# Altium PCB wifi_car.PcbDoc (part 4 of 5)
Units mm, origin at the board's own origin, x right, y up, seen from the top; angles counter-clockwise.
Board outline 68.55 x 80.89 mm, 2 copper layers (Top Layer, Bottom Layer); 133 components, 98 nets, 473 pads, 106 vias.
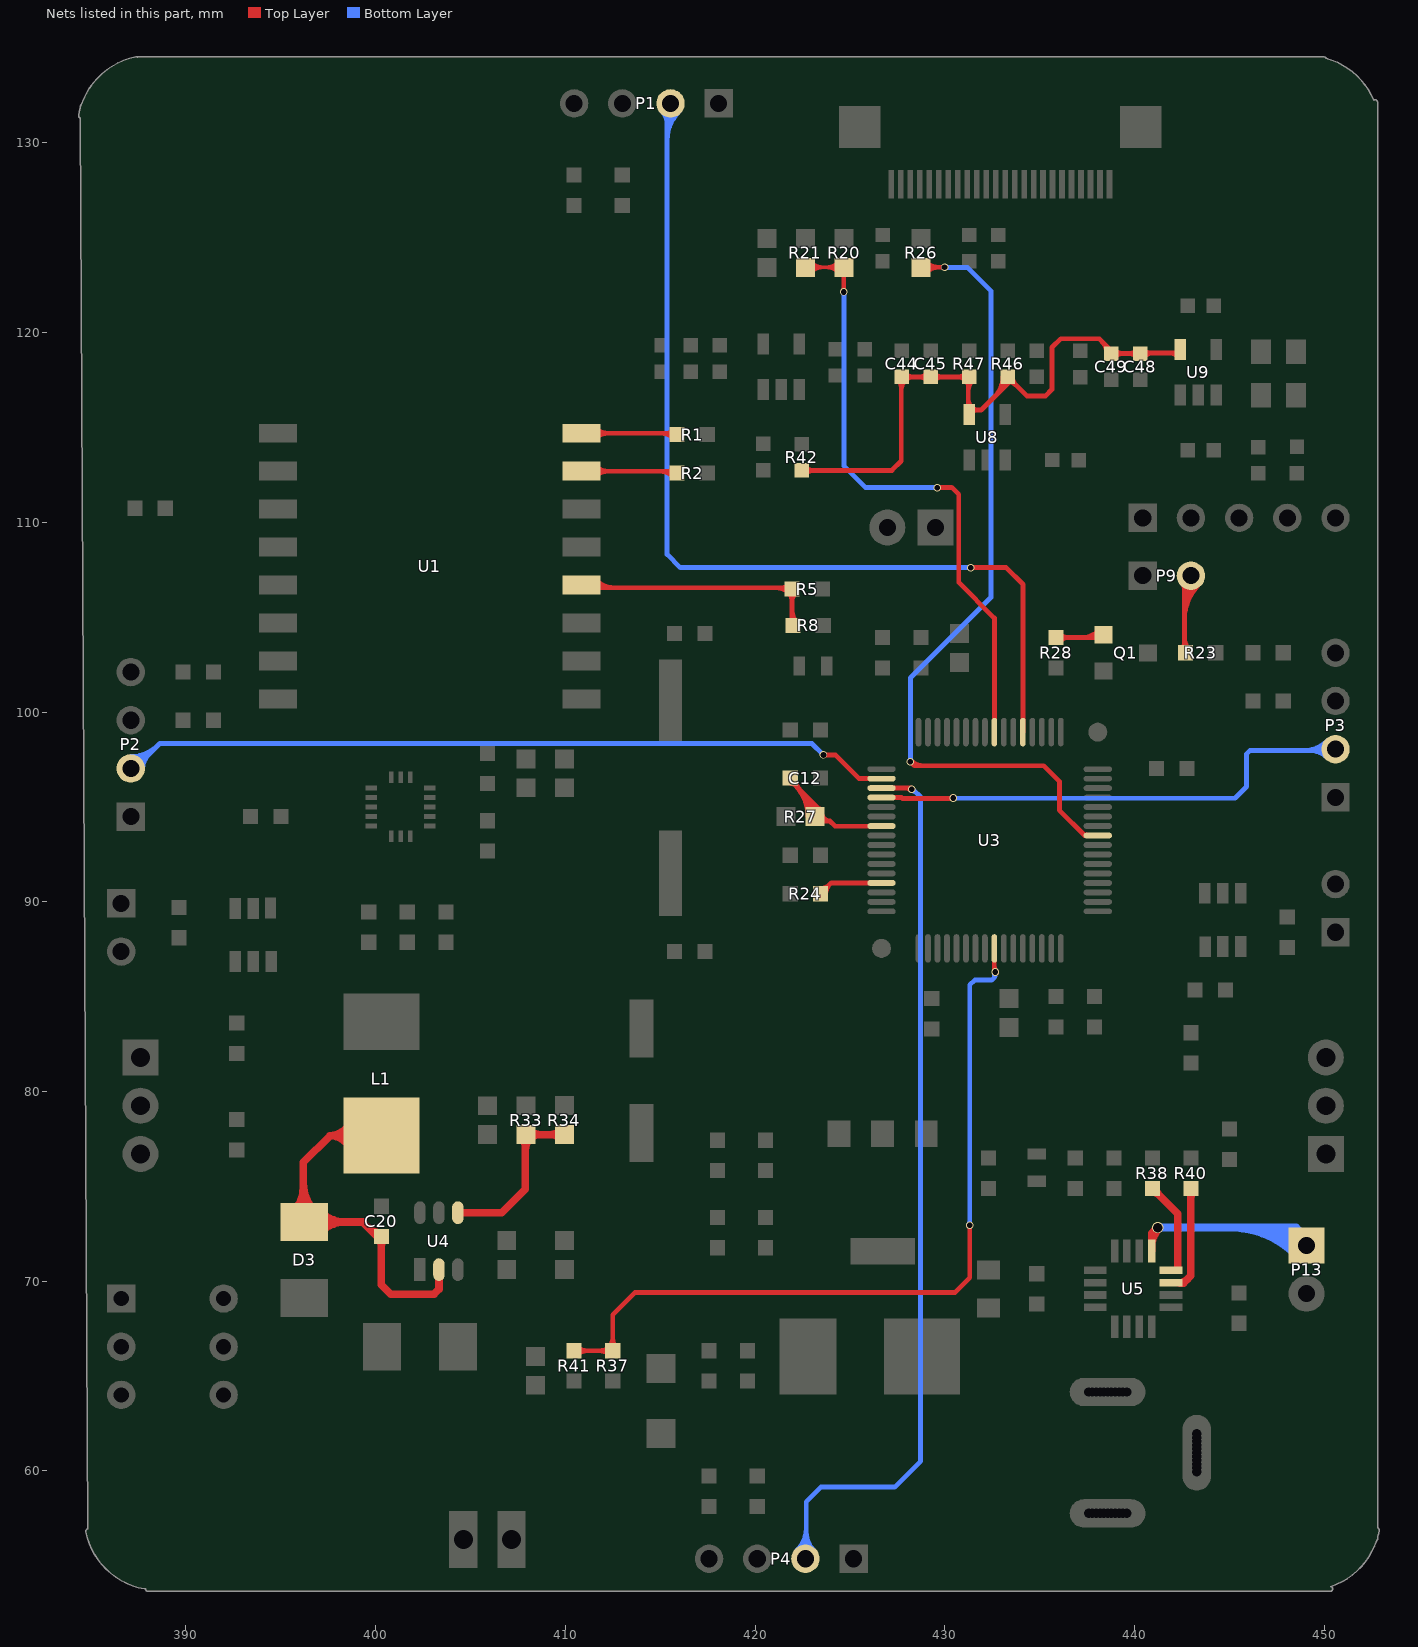
[diagram p4: the nets of this part, all layers, seen from the top]

## Via types
v1: diameter 0.4, hole 0.3, Top Layer to Bottom Layer, 101 vias
v2: diameter 5, hole 4.8, Top Layer to Bottom Layer, 4 vias
v3: diameter 0.6, hole 0.5, Top Layer to Bottom Layer, 1 vias

## Nets (pads, with @x,y where several pads share a name; then routed paths per layer and width w, separated by ;. In a path a pad name is that pad's centre, name@x,y a point inside that pad or via, vN(x,y) a via of type N, cw(c..) or ccw(c..) an arc to the next point about the centre after c; other vN are vias at no path point) (continued)
NetP9_2: P9.2 R23.2 | length 22.6
  Top Layer w0.254: R23.2@442.63,103.289 442.63,106.842 P9.2@442.976,107.188 ; R23.2@442.491,103.317 ccw(c442.155,103.653) 442.63,103.653 ; R23.2@442.491,103.317 ccw(c442.155,103.653) 442.63,103.653 ; R23.2@442.491,103.317 ccw(c442.155,103.653) 442.63,103.653 ; P9.2@442.535,106.747 cw(c442.307,106.519) 442.63,106.519 ; P9.2@442.535,106.747 cw(c442.307,106.519) 442.63,106.519 ; P9.2@442.535,106.747 cw(c442.307,106.519) 442.63,106.519 ; 442.63,103.914 ccw(c443.474,103.914) R23.2@442.877,103.317 ; 442.63,103.914 ccw(c443.474,103.914) R23.2@442.877,103.317 ; 442.63,103.914 ccw(c443.474,103.914) R23.2@442.877,103.317 ; 442.63,104.849 cw(c445.315,104.849) P9.2@443.417,106.747 ; 442.63,104.849 cw(c445.315,104.849) P9.2@443.417,106.747 ; 442.63,104.849 cw(c445.315,104.849) P9.2@443.417,106.747 ; 442.63,105.462 cw(c444.702,105.462) P9.2@443.237,106.927 ; 442.63,105.462 cw(c444.702,105.462) P9.2@443.237,106.927 ; 442.63,105.462 cw(c444.702,105.462) P9.2@443.237,106.927 ; 442.63,106.075 cw(c444.089,106.075) P9.2@443.057,107.107 ; 442.63,106.075 cw(c444.089,106.075) P9.2@443.057,107.107 ; 442.63,106.075 cw(c444.089,106.075) P9.2@443.057,107.107
NetP13_1: P13.1 U5.13 | length 46.5
  Top Layer w0.4: U5.13@440.903,71.596 440.903,72.533 v3@441.124,72.754 ; P13.1@448.633,71.596 P13.1@448.728,71.692 ; U5.13@440.903,71.823 cw(c442.226,71.823) v3@441.29,72.758 ; U5.13@440.903,71.823 cw(c442.226,71.823) v3@441.29,72.758 ; U5.13@440.903,71.823 cw(c442.226,71.823) v3@441.29,72.758
  Bottom Layer w0.4: v3(441.22,72.829) 448.516,72.829 P13.1@449.111,72.234 ; 444.976,72.829 cw(c444.976,67.786) P13.1@448.542,71.352 ; 444.976,72.829 cw(c444.976,67.786) P13.1@448.542,71.352 ; 444.976,72.829 cw(c444.976,67.786) P13.1@448.542,71.352 ; 445.942,72.829 cw(c445.942,68.752) P13.1@448.825,71.635 ; 445.942,72.829 cw(c445.942,68.752) P13.1@448.825,71.635 ; 445.942,72.829 cw(c445.942,68.752) P13.1@448.825,71.635 ; 446.908,72.829 cw(c446.908,69.718) P13.1@449.107,71.917 ; 446.908,72.829 cw(c446.908,69.718) P13.1@449.107,71.917 ; 446.908,72.829 cw(c446.908,69.718) P13.1@449.107,71.917 ; 447.873,72.829 cw(c447.873,70.683) P13.1@449.39,72.2 ; 447.873,72.829 cw(c447.873,70.683) P13.1@449.39,72.2 ; 447.873,72.829 cw(c447.873,70.683) P13.1@449.39,72.2
NetQ1_1: Q1.1 R28.2 | length 10.1
  Top Layer w0.254: R28.2@435.864,103.924 Q1.1@438.263,103.924 ; R28.2@436.057,103.731 cw(c436.523,103.265) 436.523,103.924 ; R28.2@436.057,103.731 cw(c436.523,103.265) 436.523,103.924 ; R28.2@436.057,103.731 cw(c436.523,103.265) 436.523,103.924 ; R28.2@436.057,104.117 ccw(c436.523,104.583) 436.523,103.924 ; R28.2@436.057,104.117 ccw(c436.523,104.583) 436.523,103.924 ; R28.2@436.057,104.117 ccw(c436.523,104.583) 436.523,103.924 ; 437.205,103.924 ccw(c437.205,105.216) Q1.1@438.119,104.302 ; 437.205,103.924 ccw(c437.205,105.216) Q1.1@438.119,104.302 ; 437.205,103.924 ccw(c437.205,105.216) Q1.1@438.119,104.302 ; 437.818,103.924 ccw(c437.818,104.603) Q1.1@438.298,104.123 ; 437.818,103.924 ccw(c437.818,104.603) Q1.1@438.298,104.123 ; 437.818,103.924 ccw(c437.818,104.603) Q1.1@438.298,104.123
NetR1_1: R1.1 U1.16 | length 12.3
  Top Layer w0.254: U1.16@410.844,114.696 R1.1@415.834,114.696 ; U1.16@411.608,114.432 cw(c412.244,113.795) 412.244,114.696 ; U1.16@411.608,114.432 cw(c412.244,113.795) 412.244,114.696 ; U1.16@411.608,114.432 cw(c412.244,113.795) 412.244,114.696 ; U1.16@411.608,114.96 ccw(c412.244,115.596) 412.244,114.696 ; U1.16@411.608,114.96 ccw(c412.244,115.596) 412.244,114.696 ; U1.16@411.608,114.96 ccw(c412.244,115.596) 412.244,114.696 ; 415.052,114.696 cw(c415.052,113.8) R1.1@415.686,114.434 ; 415.052,114.696 cw(c415.052,113.8) R1.1@415.686,114.434 ; 415.052,114.696 cw(c415.052,113.8) R1.1@415.686,114.434 ; 415.387,114.696 ccw(c415.387,115.118) R1.1@415.686,114.82 ; 415.387,114.696 ccw(c415.387,115.118) R1.1@415.686,114.82 ; 415.387,114.696 ccw(c415.387,115.118) R1.1@415.686,114.82
NetR2_1: R2.1 U1.15 | length 12.4
  Top Layer w0.254: U1.15@410.844,112.696 R2.1@415.861,112.696 ; U1.15@411.608,112.432 cw(c412.244,111.795) 412.244,112.696 ; U1.15@411.608,112.432 cw(c412.244,111.795) 412.244,112.696 ; U1.15@411.608,112.432 cw(c412.244,111.795) 412.244,112.696 ; U1.15@411.608,112.96 ccw(c412.244,113.596) 412.244,112.696 ; U1.15@411.608,112.96 ccw(c412.244,113.596) 412.244,112.696 ; U1.15@411.608,112.96 ccw(c412.244,113.596) 412.244,112.696 ; 414.975,112.696 cw(c414.975,111.691) R2.1@415.686,112.402 ; 414.975,112.696 cw(c414.975,111.691) R2.1@415.686,112.402 ; 414.975,112.696 cw(c414.975,111.691) R2.1@415.686,112.402 ; 415.464,112.696 ccw(c415.464,113.009) R2.1@415.686,112.788 ; 415.464,112.696 ccw(c415.464,113.009) R2.1@415.686,112.788 ; 415.464,112.696 ccw(c415.464,113.009) R2.1@415.686,112.788
NetR5_2: R5.2 R8.2 U1.12 | length 28.3
  Top Layer w0.254: U1.12@410.811,106.554 R5.2@421.982,106.554 ; R8.2@421.956,104.712 R5.2@421.956,106.484 ; U1.12@411.428,106.78 ccw(c411.974,107.326) 411.974,106.554 ; U1.12@411.428,106.78 ccw(c411.974,107.326) 411.974,106.554 ; U1.12@411.428,106.78 ccw(c411.974,107.326) 411.974,106.554 ; U1.12@411.608,106.432 cw(c411.902,106.138) 411.902,106.554 ; U1.12@411.608,106.432 cw(c411.902,106.138) 411.902,106.554 ; U1.12@411.608,106.432 cw(c411.902,106.138) 411.902,106.554 ; U1.12@411.608,106.96 ccw(c412.587,107.939) 412.587,106.554 ; U1.12@411.608,106.96 ccw(c412.587,107.939) 412.587,106.554 ; U1.12@411.608,106.96 ccw(c412.587,107.939) 412.587,106.554 ; 421.128,106.554 cw(c421.128,105.657) R5.2@421.763,106.291 ; 421.128,106.554 cw(c421.128,105.657) R5.2@421.763,106.291 ; 421.128,106.554 cw(c421.128,105.657) R5.2@421.763,106.291 ; 421.465,106.554 ccw(c421.465,106.975) R5.2@421.763,106.678 ; 421.465,106.554 ccw(c421.465,106.975) R5.2@421.763,106.678 ; 421.465,106.554 ccw(c421.465,106.975) R5.2@421.763,106.678 ; R5.2@421.763,106.291 cw(c421.297,105.825) 421.956,105.825 ; R5.2@421.763,106.291 cw(c421.297,105.825) 421.956,105.825 ; R5.2@421.763,106.291 cw(c421.297,105.825) 421.956,105.825 ; R8.2@421.805,104.76 ccw(c421.439,105.125) 421.956,105.125 ; R8.2@421.805,104.76 ccw(c421.439,105.125) 421.956,105.125 ; R8.2@421.805,104.76 ccw(c421.439,105.125) 421.956,105.125 ; 421.956,105.326 ccw(c422.757,105.326) R8.2@422.191,104.76 ; 421.956,105.326 ccw(c422.757,105.326) R8.2@422.191,104.76 ; 421.956,105.326 ccw(c422.757,105.326) R8.2@422.191,104.76 ; 421.956,105.825 cw(c422.615,105.825) R5.2@422.149,106.291 ; 421.956,105.825 cw(c422.615,105.825) R5.2@422.149,106.291 ; 421.956,105.825 cw(c422.615,105.825) R5.2@422.149,106.291
NetR20_2: R20.2 R21.1 U3.56 | length 41.7
  Top Layer w0.2: R21.1@422.653,123.444 R20.2@424.504,123.444 ; R21.1@422.935,123.161 cw(c423.618,122.479) 423.618,123.444 ; R21.1@422.935,123.161 cw(c423.618,122.479) 423.618,123.444 ; R21.1@422.935,123.161 cw(c423.618,122.479) 423.618,123.444 ; R21.1@422.935,123.727 ccw(c423.618,124.41) 423.618,123.444 ; R21.1@422.935,123.727 ccw(c423.618,124.41) 423.618,123.444 ; R21.1@422.935,123.727 ccw(c423.618,124.41) 423.618,123.444 ; 423.722,123.444 cw(c423.722,122.473) R20.2@424.409,123.16 ; 423.722,123.444 cw(c423.722,122.473) R20.2@424.409,123.16 ; 423.722,123.444 cw(c423.722,122.473) R20.2@424.409,123.16 ; 423.73,123.444 ccw(c423.73,124.404) R20.2@424.409,123.726 ; 423.73,123.444 ccw(c423.73,124.404) R20.2@424.409,123.726 ; 423.73,123.444 ccw(c423.73,124.404) R20.2@424.409,123.726
  Top Layer w0.254: v1(424.676,122.145) R20.2@424.676,123.289 ; v1@429.621,111.843 430.369,111.843 430.736,111.476 430.736,106.836 432.616,104.956 U3.56@432.616,98.943 ; v1@429.657,111.777 cw(c429.818,111.616) 429.818,111.843 ; v1@429.657,111.777 cw(c429.818,111.616) 429.818,111.843 ; v1@429.657,111.777 cw(c429.818,111.616) 429.818,111.843
  Bottom Layer w0.254: v1@424.681,122.091 424.681,112.976 425.829,111.828 v1(429.606,111.828)
NetR24_1: R24.1 U3.13 | length 6.4
  Top Layer w0.254: R24.1@423.587,90.566 424.013,90.993 U3.13@426.666,90.993 ; R24.1@423.456,90.697 ccw(c423.456,91.329) 423.903,90.882 ; R24.1@423.456,90.697 ccw(c423.456,91.329) 423.903,90.882 ; R24.1@423.456,90.697 ccw(c423.456,91.329) 423.903,90.882 ; R24.1@423.729,90.424 cw(c424.415,90.424) 423.93,90.909 ; R24.1@423.729,90.424 cw(c424.415,90.424) 423.93,90.909 ; R24.1@423.729,90.424 cw(c424.415,90.424) 423.93,90.909
NetR26_2: R26.2 U3.41 | length 51.1
  Top Layer w0.254: v1@428.185,97.381 428.4,97.166 435.218,97.166 436.042,96.342 436.042,94.821 437.37,93.493 U3.41@438.066,93.493 ; R26.2@428.755,123.443 v1@429.868,123.443 ; v1@428.236,97.426 ccw(c428.864,98.053) 428.864,97.166 ; v1@428.236,97.426 ccw(c428.864,98.053) 428.864,97.166 ; v1@428.236,97.426 ccw(c428.864,98.053) 428.864,97.166 ; R26.2@429.019,123.179 cw(c429.656,122.542) 429.656,123.443 ; R26.2@429.019,123.179 cw(c429.656,122.542) 429.656,123.443 ; R26.2@429.019,123.179 cw(c429.656,122.542) 429.656,123.443 ; R26.2@429.019,123.706 ccw(c429.656,124.343) 429.656,123.443 ; R26.2@429.019,123.706 ccw(c429.656,124.343) 429.656,123.443 ; R26.2@429.019,123.706 ccw(c429.656,124.343) 429.656,123.443 ; 437.263,93.599 ccw(c437.466,93.802) U3.41@437.466,93.516 ; 437.263,93.599 ccw(c437.466,93.802) U3.41@437.466,93.516 ; 437.263,93.599 ccw(c437.466,93.802) U3.41@437.466,93.516
  Bottom Layer w0.254: v1@428.195,97.395 428.195,101.798 432.435,106.038 432.435,122.206 431.216,123.425 430.141,123.425 v1@430.063,123.503 ; v1@428.133,97.426 ccw(c427.983,97.576) 428.195,97.576 ; v1@428.133,97.426 ccw(c427.983,97.576) 428.195,97.576 ; v1@428.133,97.426 ccw(c427.983,97.576) 428.195,97.576 ; v1@430.042,123.496 ccw(c430.213,123.667) 430.213,123.425 ; v1@430.042,123.496 ccw(c430.213,123.667) 430.213,123.425 ; v1@430.042,123.496 ccw(c430.213,123.667) 430.213,123.425
  other v1: 428.185,97.374 429.99,123.444
NetR33_2: R33.2 R34.1 U4.4 | length 18.8
  Top Layer w0.4: U4.4@404.336,73.612 406.647,73.612 407.889,74.854 R33.2@407.889,77.627 ; R33.2@407.927,77.723 R34.1@409.678,77.723 ; R33.2@407.715,77.51 cw(c407.295,77.091) 407.889,77.091 ; R33.2@407.715,77.51 cw(c407.295,77.091) 407.889,77.091 ; R33.2@407.715,77.51 cw(c407.295,77.091) 407.889,77.091 ; 407.889,76.906 cw(c408.744,76.906) R33.2@408.14,77.51 ; 407.889,76.906 cw(c408.744,76.906) R33.2@408.14,77.51 ; 407.889,76.906 cw(c408.744,76.906) R33.2@408.14,77.51 ; R33.2@408.14,77.51 cw(c408.652,76.998) 408.652,77.723 ; R33.2@408.14,77.51 cw(c408.652,76.998) 408.652,77.723 ; R33.2@408.14,77.51 cw(c408.652,76.998) 408.652,77.723 ; R33.2@408.14,77.935 ccw(c408.652,78.447) 408.652,77.723 ; R33.2@408.14,77.935 ccw(c408.652,78.447) 408.652,77.723 ; R33.2@408.14,77.935 ccw(c408.652,78.447) 408.652,77.723 ; 409.224,77.723 ccw(c409.224,78.453) R34.1@409.74,77.936 ; 409.224,77.723 ccw(c409.224,78.453) R34.1@409.74,77.936 ; 409.224,77.723 ccw(c409.224,78.453) R34.1@409.74,77.936 ; 409.232,77.723 cw(c409.232,77.004) R34.1@409.74,77.512 ; 409.232,77.723 cw(c409.232,77.004) R34.1@409.74,77.512 ; 409.232,77.723 cw(c409.232,77.004) R34.1@409.74,77.512
NetR38_2: R38.2 U5.12 | length 7.1
  Top Layer w0.4: R38.2@440.944,74.892 442.291,73.545 U5.12@442.291,70.668 ; R38.2@440.944,74.692 cw(c440.944,74.209) R38.2@441.285,74.551 ; R38.2@440.944,74.692 cw(c440.944,74.209) R38.2@441.285,74.551 ; R38.2@440.944,74.692 cw(c440.944,74.209) R38.2@441.285,74.551 ; R38.2@441.144,74.892 ccw(c441.627,74.892) R38.2@441.285,74.551 ; R38.2@441.144,74.892 ccw(c441.627,74.892) R38.2@441.285,74.551 ; R38.2@441.144,74.892 ccw(c441.627,74.892) R38.2@441.285,74.551
NetR40_2: R40.2 U5.11 | length 9.2
  Top Layer w0.4: U5.11@442.417,69.906 442.59,69.906 442.976,70.292 R40.2@442.976,74.892 ; U5.11@442.328,69.921 ccw(c442.328,70.589) 442.8,70.117 ; U5.11@442.328,69.921 ccw(c442.328,70.589) 442.8,70.117 ; U5.11@442.328,69.921 ccw(c442.328,70.589) 442.8,70.117 ; R40.2@442.835,74.751 cw(c442.493,74.409) 442.976,74.409 ; R40.2@442.835,74.751 cw(c442.493,74.409) 442.976,74.409 ; R40.2@442.835,74.751 cw(c442.493,74.409) 442.976,74.409 ; 442.976,74.409 cw(c443.459,74.409) R40.2@443.117,74.751 ; 442.976,74.409 cw(c443.459,74.409) R40.2@443.117,74.751 ; 442.976,74.409 cw(c443.459,74.409) R40.2@443.117,74.751
OUT: C20.2 D3.2 L1.1 U4.2 | length 58.2
  Top Layer w0.4: D3.2@396.189,73.421 396.189,76.268 397.596,77.675 ; D3.2@396.24,73.12 399.314,73.12 C20.2@400.141,72.293 ; C20.2@400.304,72.352 400.304,69.815 400.796,69.323 403.076,69.323 403.34,69.587 U4.2@403.34,70.307 ; L1.1@400.304,77.675 397.596,77.675 ; D3.2@395.674,73.686 ccw(c394.432,74.929) 396.189,74.929 ; D3.2@395.674,73.686 ccw(c394.432,74.929) 396.189,74.929 ; D3.2@395.674,73.686 ccw(c394.432,74.929) 396.189,74.929 ; 396.189,74.209 ccw(c397.329,74.209) D3.2@396.523,73.403 ; 396.189,74.209 ccw(c397.329,74.209) D3.2@396.523,73.403 ; 396.189,74.209 ccw(c397.329,74.209) D3.2@396.523,73.403 ; 396.189,75.174 ccw(c398.294,75.174) D3.2@396.806,73.686 ; 396.189,75.174 ccw(c398.294,75.174) D3.2@396.806,73.686 ; 396.189,75.174 ccw(c398.294,75.174) D3.2@396.806,73.686 ; D3.2@397.056,72.554 cw(c398.421,71.189) 398.421,73.12 ; D3.2@397.056,72.554 cw(c398.421,71.189) 398.421,73.12 ; D3.2@397.056,72.554 cw(c398.421,71.189) 398.421,73.12 ; D3.2@397.056,73.686 ccw(c398.421,75.051) 398.421,73.12 ; D3.2@397.056,73.686 ccw(c398.421,75.051) 398.421,73.12 ; D3.2@397.056,73.686 ccw(c398.421,75.051) 398.421,73.12 ; 397.596,77.675 ccw(c397.596,78.812) L1.1@398.644,78.372 ; 397.596,77.675 cw(c397.596,76.538) L1.1@398.644,76.978 ; 397.596,77.675 ccw(c397.596,78.812) L1.1@398.644,78.372 ; 397.596,77.675 cw(c397.596,76.538) L1.1@398.644,76.978 ; 397.596,77.675 ccw(c397.596,78.812) L1.1@398.644,78.372 ; 397.596,77.675 cw(c397.596,76.538) L1.1@398.644,76.978 ; 398.198,77.675 ccw(c398.198,78.559) L1.1@399.013,78.217 ; 398.198,77.675 cw(c398.198,76.791) L1.1@399.013,77.133 ; 398.198,77.675 ccw(c398.198,78.559) L1.1@399.013,78.217 ; 398.198,77.675 cw(c398.198,76.791) L1.1@399.013,77.133 ; 398.198,77.675 ccw(c398.198,78.559) L1.1@399.013,78.217 ; 398.198,77.675 cw(c398.198,76.791) L1.1@399.013,77.133 ; 399.584,72.85 ccw(c400.304,73.57) C20.2@400.304,72.552 ; 399.584,72.85 ccw(c400.304,73.57) C20.2@400.304,72.552 ; 399.584,72.85 ccw(c400.304,73.57) C20.2@400.304,72.552 ; C20.2@400.163,72.211 cw(c399.821,71.869) 400.304,71.869 ; C20.2@400.163,72.211 cw(c399.821,71.869) 400.304,71.869 ; C20.2@400.163,72.211 cw(c399.821,71.869) 400.304,71.869 ; 400.304,71.869 cw(c400.787,71.869) C20.2@400.445,72.211 ; 400.304,71.869 cw(c400.787,71.869) C20.2@400.445,72.211 ; 400.304,71.869 cw(c400.787,71.869) C20.2@400.445,72.211
RST: C12.2 R27.2 U3.7 | length 24.5
  Top Layer w0.254: C12.2@421.856,96.52 421.856,96.402 423.356,94.902 R27.2@423.42,94.902 ; R27.2@423.198,94.407 423.349,94.256 423.946,94.256 ; U3.7@426.662,93.997 U3.7@426.666,93.993 ; U3.7@426.729,93.979 424.223,93.979 423.946,94.256 ; C12.2@421.856,96.247 cw(c421.856,95.874) C12.2@422.12,96.138 ; C12.2@421.856,96.247 cw(c421.856,95.874) C12.2@422.12,96.138 ; C12.2@421.856,96.247 cw(c421.856,95.874) C12.2@422.12,96.138 ; C12.2@422.104,96.154 cw(c420.442,94.491) R27.2@422.792,94.491 ; C12.2@422.104,96.154 cw(c420.442,94.491) R27.2@422.792,94.491 ; C12.2@422.104,96.154 cw(c420.442,94.491) R27.2@422.792,94.491 ; C12.2@422.129,96.52 ccw(c423.074,96.52) 422.406,95.852 ; C12.2@422.129,96.52 ccw(c423.074,96.52) 422.406,95.852 ; C12.2@422.129,96.52 ccw(c423.074,96.52) 422.406,95.852 ; 422.537,95.72 cw(c421.309,94.491) R27.2@423.046,94.491 ; 422.537,95.72 cw(c421.309,94.491) R27.2@423.046,94.491 ; 422.537,95.72 cw(c421.309,94.491) R27.2@423.046,94.491 ; 422.971,95.286 cw(c422.176,94.491) R27.2@423.3,94.491 ; 422.971,95.286 cw(c422.176,94.491) R27.2@423.3,94.491 ; 422.971,95.286 cw(c422.176,94.491) R27.2@423.3,94.491 ; R27.2@423.281,94.52 ccw(c423.62,94.606) R27.2@423.62,94.256 ; R27.2@423.281,94.52 ccw(c423.62,94.606) R27.2@423.62,94.256 ; R27.2@423.281,94.52 ccw(c423.62,94.606) R27.2@423.62,94.256 ; R27.2@423.527,94.582 ccw(c423.946,94.688) 423.946,94.256 ; R27.2@423.527,94.582 ccw(c423.946,94.688) 423.946,94.256 ; R27.2@423.527,94.582 ccw(c423.946,94.688) 423.946,94.256
TRIG_B: P4.2 U3.3 | length 59.5
  Top Layer w0.254: U3.3@426.666,95.993 v1@428.229,95.993 ; 427.922,95.993 cw(c427.922,95.597) v1@428.202,95.877 ; 427.922,95.993 cw(c427.922,95.597) v1@428.202,95.877 ; 427.922,95.993 cw(c427.922,95.597) v1@428.202,95.877
  Bottom Layer w0.254: P4.2@422.696,55.883 422.696,58.372 423.472,59.148 427.354,59.148 428.725,60.519 428.725,95.521 v1@428.345,95.901 ; P4.2@422.216,55.813 ccw(c421.056,56.972) 422.696,56.972 ; P4.2@422.216,55.813 ccw(c421.056,56.972) 422.696,56.972 ; P4.2@422.216,55.813 ccw(c421.056,56.972) 422.696,56.972 ; P4.2@422.395,55.633 ccw(c421.669,56.359) 422.696,56.359 ; P4.2@422.395,55.633 ccw(c421.669,56.359) 422.696,56.359 ; P4.2@422.395,55.633 ccw(c421.669,56.359) 422.696,56.359 ; 422.696,56.167 ccw(c423.451,56.167) P4.2@422.917,55.633 ; 422.696,56.167 ccw(c423.451,56.167) P4.2@422.917,55.633 ; 422.696,56.167 ccw(c423.451,56.167) P4.2@422.917,55.633 ; 422.696,56.78 ccw(c424.064,56.78) P4.2@423.097,55.813 ; 422.696,56.78 ccw(c424.064,56.78) P4.2@423.097,55.813 ; 422.696,56.78 ccw(c424.064,56.78) P4.2@423.097,55.813 ; v1@428.253,95.855 cw(c428.253,95.522) 428.489,95.758 ; v1@428.253,95.855 cw(c428.253,95.522) 428.489,95.758 ; v1@428.253,95.855 cw(c428.253,95.522) 428.489,95.758
  other v1: 428.253,95.928
TRIG_F: P1.2 U3.53 | length 61.3
  Top Layer w0.254: v1@431.413,107.615 433.234,107.615 434.123,106.727 434.123,100.618 U3.53@434.116,98.943
  Bottom Layer w0.254: P1.2@415.398,131.85 415.366,131.818 415.366,108.308 416.058,107.617 v1@431.381,107.617 ; P1.2@415.103,131.639 cw(c414.469,131.005) 415.366,131.005 ; P1.2@415.103,131.639 cw(c414.469,131.005) 415.366,131.005 ; P1.2@415.103,131.639 cw(c414.469,131.005) 415.366,131.005 ; 415.366,130.147 cw(c417.477,130.147) P1.2@415.985,131.639 ; 415.366,130.147 cw(c417.477,130.147) P1.2@415.985,131.639 ; 415.366,130.147 cw(c417.477,130.147) P1.2@415.985,131.639 ; 415.366,130.76 cw(c416.864,130.76) P1.2@415.805,131.819 ; 415.366,130.76 cw(c416.864,130.76) P1.2@415.805,131.819 ; 415.366,130.76 cw(c416.864,130.76) P1.2@415.805,131.819
  other v1: 431.374,107.611
TRIG_L: P2.2 U3.2 | length 50.8
  Top Layer w0.254: v1@423.621,97.731 424.25,97.731 425.477,96.503 U3.2@426.397,96.503
  Bottom Layer w0.254: P2.2@387.305,97.021 388.625,98.342 422.997,98.342 v1@423.575,97.764 ; P2.2@387.096,97.397 ccw(c387.096,98.809) 388.094,97.811 ; P2.2@387.096,97.397 ccw(c387.096,98.809) 388.094,97.811 ; P2.2@387.096,97.397 ccw(c387.096,98.809) 388.094,97.811 ; P2.2@387.096,97.651 ccw(c387.096,99.676) 388.528,98.244 ; P2.2@387.096,97.651 ccw(c387.096,99.676) 388.528,98.244 ; P2.2@387.096,97.651 ccw(c387.096,99.676) 388.528,98.244 ; P2.2@387.719,97.028 cw(c388.702,97.028) 388.007,97.723 ; P2.2@387.719,97.028 cw(c388.702,97.028) 388.007,97.723 ; P2.2@387.719,97.028 cw(c388.702,97.028) 388.007,97.723
  other v1: 423.604,97.739
TRIG_R: P3.2 U3.4 | length 36.2
  Top Layer w0.254: U3.4@426.666,95.493 427.726,95.493 427.777,95.441 v1@430.431,95.441 ; 430.212,95.441 ccw(c430.212,95.712) v1@430.403,95.521 ; 430.212,95.441 ccw(c430.212,95.712) v1@430.403,95.521 ; 430.212,95.441 ccw(c430.212,95.712) v1@430.403,95.521
  Bottom Layer w0.254: v1@430.419,95.46 445.298,95.46 445.913,96.075 445.913,97.797 446.086,97.97 447.366,97.97 ; 447.355,97.969 P3.2@450.376,97.969 ; 448.91,97.969 ccw(c448.91,99.73) P3.2@450.156,98.485 ; 448.91,97.969 ccw(c448.91,99.73) P3.2@450.156,98.485 ; 448.91,97.969 ccw(c448.91,99.73) P3.2@450.156,98.485 ; 449.274,97.969 cw(c449.274,96.722) P3.2@450.156,97.604 ; 449.274,97.969 cw(c449.274,96.722) P3.2@450.156,97.604 ; 449.274,97.969 cw(c449.274,96.722) P3.2@450.156,97.604 ; 449.524,97.969 ccw(c449.524,99.116) P3.2@450.335,98.305 ; 449.524,97.969 ccw(c449.524,99.116) P3.2@450.335,98.305 ; 449.524,97.969 ccw(c449.524,99.116) P3.2@450.335,98.305
  other v1: 430.455,95.469
VBAT_SAMP: R37.2 R41.1 U3.25 | length 53.9
  Top Layer w0.254: R41.1@410.464,66.332 R37.2@412.37,66.332 ; R37.2@412.496,66.332 412.496,68.229 413.675,69.408 430.545,69.408 431.321,70.184 v1@431.321,72.891 ; U3.25@432.612,87.604 432.612,86.374 v1@432.737,86.249 ; R41.1@410.657,66.139 cw(c411.123,65.673) 411.123,66.332 ; R41.1@410.657,66.139 cw(c411.123,65.673) 411.123,66.332 ; R41.1@410.657,66.139 cw(c411.123,65.673) 411.123,66.332 ; R41.1@410.657,66.525 ccw(c411.123,66.991) 411.123,66.332 ; R41.1@410.657,66.525 ccw(c411.123,66.991) 411.123,66.332 ; R41.1@410.657,66.525 ccw(c411.123,66.991) 411.123,66.332 ; 411.837,66.332 ccw(c411.837,66.991) R37.2@412.303,66.525 ; 411.837,66.332 cw(c411.837,65.673) R37.2@412.303,66.139 ; 411.837,66.332 ccw(c411.837,66.991) R37.2@412.303,66.525 ; 411.837,66.332 cw(c411.837,65.673) R37.2@412.303,66.139 ; 411.837,66.332 ccw(c411.837,66.991) R37.2@412.303,66.525 ; 411.837,66.332 cw(c411.837,65.673) R37.2@412.303,66.139 ; R37.2@412.303,66.525 ccw(c411.837,66.991) 412.496,66.991 ; R37.2@412.303,66.525 ccw(c411.837,66.991) 412.496,66.991 ; R37.2@412.303,66.525 ccw(c411.837,66.991) 412.496,66.991 ; 412.496,66.991 ccw(c413.155,66.991) R37.2@412.689,66.525 ; 412.496,66.991 ccw(c413.155,66.991) R37.2@412.689,66.525 ; 412.496,66.991 ccw(c413.155,66.991) R37.2@412.689,66.525 ; v1@431.259,72.902 cw(c431.107,72.751) 431.321,72.751 ; v1@431.259,72.902 cw(c431.107,72.751) 431.321,72.751 ; v1@431.259,72.902 cw(c431.107,72.751) 431.321,72.751 ; 432.612,86.591 ccw(c432.953,86.591) v1@432.712,86.35 ; 432.612,86.591 ccw(c432.953,86.591) v1@432.712,86.35 ; 432.612,86.591 ccw(c432.953,86.591) v1@432.712,86.35
  Bottom Layer w0.254: v1@431.321,72.987 431.321,85.615 431.58,85.874 432.473,85.874 432.629,86.03 v1@432.629,86.329 ; v1@431.259,73.006 ccw(c431.107,73.157) 431.321,73.157 ; v1@431.259,73.006 ccw(c431.107,73.157) 431.321,73.157 ; v1@431.259,73.006 ccw(c431.107,73.157) 431.321,73.157 ; 432.591,85.992 ccw(c432.455,86.129) v1@432.604,86.252 ; 432.591,85.992 ccw(c432.455,86.129) v1@432.604,86.252 ; 432.591,85.992 ccw(c432.455,86.129) v1@432.604,86.252
  other v1: 431.31,72.954 432.66,86.299
VCC2V8: C44.2 C45.2 C48.2 C49.2 R42.2 R46.2 R47.2 U8.5 U9.5 | length 74.8
  Top Layer w0.254: R42.2@422.47,112.739 427.214,112.739 427.708,113.233 427.708,117.396 C44.2@427.837,117.525 ; C44.2@427.734,117.665 C45.2@429.258,117.665 431.168,117.665 431.242,117.591 U8.5@431.242,115.994 ; U8.5@431.391,115.921 431.926,115.921 R46.2@433.451,117.445 ; C49.2@438.784,118.893 C48.2@440.308,118.893 440.527,118.893 440.556,118.921 U9.5@442.31,118.921 ; C49.2@438.839,118.991 438.148,119.682 436.112,119.682 435.652,119.221 435.652,117.003 435.315,116.667 434.321,116.667 R46.2@433.322,117.666 ; R42.2@422.65,112.559 cw(c423.083,112.126) 423.083,112.739 ; R42.2@422.65,112.559 cw(c423.083,112.126) 423.083,112.739 ; R42.2@422.65,112.559 cw(c423.083,112.126) 423.083,112.739 ; R42.2@422.65,112.918 ccw(c423.083,113.352) 423.083,112.739 ; R42.2@422.65,112.918 ccw(c423.083,113.352) 423.083,112.739 ; R42.2@422.65,112.918 ccw(c423.083,113.352) 423.083,112.739 ; C44.2@427.555,117.486 cw(c427.185,117.116) 427.708,117.116 ; C44.2@427.555,117.486 cw(c427.185,117.116) 427.708,117.116 ; C44.2@427.555,117.486 cw(c427.185,117.116) 427.708,117.116 ; 427.708,116.988 cw(c428.412,116.988) C44.2@427.914,117.486 ; 427.708,116.988 cw(c428.412,116.988) C44.2@427.914,117.486 ; 427.708,116.988 cw(c428.412,116.988) C44.2@427.914,117.486 ; C44.2@427.914,117.486 cw(c428.348,117.052) 428.348,117.665 ; C44.2@427.914,117.486 cw(c428.348,117.052) 428.348,117.665 ; C44.2@427.914,117.486 cw(c428.348,117.052) 428.348,117.665 ; C44.2@427.914,117.845 ccw(c428.348,118.279) 428.348,117.665 ; C44.2@427.914,117.845 ccw(c428.348,118.279) 428.348,117.665 ; C44.2@427.914,117.845 ccw(c428.348,118.279) 428.348,117.665 ; 428.645,117.665 ccw(c428.645,118.279) C45.2@429.079,117.845 ; 428.645,117.665 cw(c428.645,117.052) C45.2@429.079,117.486 ; 428.645,117.665 ccw(c428.645,118.279) C45.2@429.079,117.845 ; 428.645,117.665 cw(c428.645,117.052) C45.2@429.079,117.486 ; 428.645,117.665 ccw(c428.645,118.279) C45.2@429.079,117.845 ; 428.645,117.665 cw(c428.645,117.052) C45.2@429.079,117.486 ; C45.2@429.438,117.486 cw(c429.872,117.052) 429.872,117.665 ; C45.2@429.438,117.486 cw(c429.872,117.052) 429.872,117.665 ; C45.2@429.438,117.486 cw(c429.872,117.052) 429.872,117.665 ; C45.2@429.438,117.845 ccw(c429.872,118.279) 429.872,117.665 ; C45.2@429.438,117.845 ccw(c429.872,118.279) 429.872,117.665 ; C45.2@429.438,117.845 ccw(c429.872,118.279) 429.872,117.665 ; 430.677,117.665 ccw(c430.677,118.279) R47.2@431.111,117.845 ; 430.677,117.665 cw(c430.677,117.053) R47.2@431.111,117.486 ; 430.677,117.665 ccw(c430.677,118.279) R47.2@431.111,117.845 ; 430.677,117.665 cw(c430.677,117.053) R47.2@431.111,117.486 ; 430.677,117.665 ccw(c430.677,118.279) R47.2@431.111,117.845 ; 430.677,117.665 cw(c430.677,117.053) R47.2@431.111,117.486 ; R47.2@431.111,117.486 cw(c430.794,117.169) 431.242,117.169 ; R47.2@431.111,117.486 cw(c430.794,117.169) 431.242,117.169 ; R47.2@431.111,117.486 cw(c430.794,117.169) 431.242,117.169 ; U8.5@431.17,116.056 ccw(c430.995,116.231) U8.5@431.242,116.231 ; U8.5@431.17,116.056 ccw(c430.995,116.231) U8.5@431.242,116.231 ; U8.5@431.17,116.056 ccw(c430.995,116.231) U8.5@431.242,116.231 ; 431.242,116.472 ccw(c431.83,116.472) U8.5@431.414,116.056 ; 431.242,116.472 ccw(c431.83,116.472) U8.5@431.414,116.056 ; 431.242,116.472 ccw(c431.83,116.472) U8.5@431.414,116.056 ; 431.242,116.936 cw(c432.02,116.936) R47.2@431.47,117.486 ; 431.242,116.936 cw(c432.02,116.936) R47.2@431.47,117.486 ; 431.242,116.936 cw(c432.02,116.936) R47.2@431.47,117.486 ; U8.5@431.414,115.812 cw(c431.677,115.549) 431.677,115.921 ; U8.5@431.414,115.812 cw(c431.677,115.549) 431.677,115.921 ; U8.5@431.414,115.812 cw(c431.677,115.549) 431.677,115.921 ; U8.5@431.414,116.056 ccw(c431.742,116.384) 431.742,115.921 ; U8.5@431.414,116.056 ccw(c431.742,116.384) 431.742,115.921 ; U8.5@431.414,116.056 ccw(c431.742,116.384) 431.742,115.921 ; 432.642,116.636 ccw(c431.612,117.666) R46.2@433.068,117.666 ; 432.642,116.636 ccw(c431.612,117.666) R46.2@433.068,117.666 ; 432.642,116.636 ccw(c431.612,117.666) R46.2@433.068,117.666 ; 433.076,117.07 ccw(c432.48,117.666) R46.2@433.322,117.666 ; 433.076,117.07 ccw(c432.48,117.666) R46.2@433.322,117.666 ; 433.076,117.07 ccw(c432.48,117.666) R46.2@433.322,117.666 ; R46.2@433.322,117.412 cw(c433.322,116.798) 433.756,117.232 ; R46.2@433.322,117.412 cw(c433.322,116.798) 433.756,117.232 ; R46.2@433.322,117.412 cw(c433.322,116.798) 433.756,117.232 ; R46.2@433.576,117.666 ccw(c434.19,117.666) 433.756,117.232 ; R46.2@433.576,117.666 ccw(c434.19,117.666) 433.756,117.232 ; R46.2@433.576,117.666 ccw(c434.19,117.666) 433.756,117.232 ; 438.242,119.588 cw(c437.546,118.893) C49.2@438.53,118.893 ; 438.242,119.588 cw(c437.546,118.893) C49.2@438.53,118.893 ; 438.242,119.588 cw(c437.546,118.893) C49.2@438.53,118.893 ; C49.2@438.963,118.713 cw(c439.397,118.28) 439.397,118.893 ; C49.2@438.963,118.713 cw(c439.397,118.28) 439.397,118.893 ; C49.2@438.963,118.713 cw(c439.397,118.28) 439.397,118.893 ; C49.2@438.963,119.072 ccw(c439.397,119.506) 439.397,118.893 ; C49.2@438.963,119.072 ccw(c439.397,119.506) 439.397,118.893 ; C49.2@438.963,119.072 ccw(c439.397,119.506) 439.397,118.893 ; 439.695,118.893 ccw(c439.695,119.506) C48.2@440.128,119.072 ; 439.695,118.893 cw(c439.695,118.28) C48.2@440.128,118.713 ; 439.695,118.893 ccw(c439.695,119.506) C48.2@440.128,119.072 ; 439.695,118.893 cw(c439.695,118.28) C48.2@440.128,118.713 ; 439.695,118.893 ccw(c439.695,119.506) C48.2@440.128,119.072 ; 439.695,118.893 cw(c439.695,118.28) C48.2@440.128,118.713 ; C48.2@440.487,118.713 cw(c440.989,118.211) 440.989,118.921 ; C48.2@440.487,118.713 cw(c440.989,118.211) 440.989,118.921 ; C48.2@440.487,118.713 cw(c440.989,118.211) 440.989,118.921 ; C48.2@440.487,119.072 ccw(c440.853,119.438) 440.853,118.921 ; C48.2@440.487,119.072 ccw(c440.853,119.438) 440.853,118.921 ; C48.2@440.487,119.072 ccw(c440.853,119.438) 440.853,118.921 ; 441.853,118.921 cw(c441.853,118.296) U9.5@442.295,118.738 ; 441.853,118.921 cw(c441.853,118.296) U9.5@442.295,118.738 ; 441.853,118.921 cw(c441.853,118.296) U9.5@442.295,118.738

## Text inside footprints (layer, text, board x,y; h text height)
C11: Top Overlay "C" at 416.31,87.526 h0.4 r270
C12: Top Overlay "C" at 422.406,96.67 h0.4 r270
C13: Top Overlay "C" at 422.906,98.91 h0.4 r90
C14: Top Overlay "C" at 422.406,92.606 h0.4 r270
C15: Top Overlay "C" at 429.468,84.349 h0.4 r180
C16: Top Overlay "C" at 438.046,84.449 h0.4 r180
C17: Top Overlay "C" at 441.71,97.178 h0.4 r270
C18: Top Overlay "C" at 428.602,102.874 h0.4
C19: Top Overlay "C" at 426.57,102.874 h0.4
C20: Top Overlay "C" at 400.154,72.902 h0.4
C21: Top Overlay "C" at 434.998,69.846 h0.4 r180
C22: Top Overlay "C" at 432.158,69.346 h0.4
C26: Top Overlay "C" at 419.758,65.782 h0.4 r180
C27: Top Overlay "C" at 417.726,65.782 h0.4 r180
C28: Top Overlay "C" at 445.666,68.83 h0.4 r180
C29: Top Overlay "C" at 417.864,76.378 h0.4
C30: Top Overlay "C" at 420.404,76.378 h0.4
C31: Top Overlay "C" at 418.164,72.814 h0.4 r180
C32: Top Overlay "C" at 420.704,72.814 h0.4 r180
CE1: Top Overlay "+" at 413.36,83.703 h0.8 r90
R1: Top Overlay "R" at 416.929,114.477 h0.4 r90
R2: Top Overlay "R" at 416.929,112.445 h0.4 r90
R3: Top Overlay "C" at 413.154,127.758 h0.4 r180
R4: Top Overlay "C" at 390.402,99.718 h0.4 r270
R5: Top Overlay "R" at 422.568,106.636 h0.4 r270
R6: Top Overlay "C" at 410.314,127.258 h0.4
R7: Top Overlay "C" at 390.902,101.958 h0.4 r90
R8: Top Overlay "R" at 422.585,104.704 h0.4 r270
R9: Top Overlay "C" at 447.29,100.434 h0.4 r90
R10: Top Overlay "C" at 419.966,58.678 h0.4
R11: Top Overlay "C" at 446.79,103.274 h0.4 r270
R12: Top Overlay "C" at 417.726,59.178 h0.4 r180
R13: Top Overlay "C" at 392.834,83.054 h0.4 r180
R14: Top Overlay "C" at 445.158,77.466 h0.4 r180
R15: Top Overlay "C" at 392.534,77.474 h0.4
R16: Top Overlay "C" at 406.042,97.278 h0.4 r180
R17: Top Overlay "C" at 406.042,93.722 h0.4 r180
R18: Top Overlay "C" at 442.826,82.046 h0.4
R23: Top Overlay "R" at 443.234,103.274 h0.4 r270
R24: Top Overlay "R" at 422.406,90.574 h0.4 r270
R28: Top Overlay "R" at 436.014,103.374 h0.4 r180
R35: Top Overlay "C" at 432.158,75.442 h0.4
R36: Top Overlay "C" at 436.73,75.442 h0.4
R37: Top Overlay "R" at 412.646,65.782 h0.4 r180
R38: Top Overlay "C" at 440.794,75.442 h0.4
R39: Top Overlay "C" at 439.062,75.942 h0.4 r180
R40: Top Overlay "R" at 442.826,75.442 h0.4
R41: Top Overlay "R" at 410.314,65.282 h0.4